# Altium PCB PCB1.PcbDoc
Units mm, origin at the board's own origin, x right, y up, seen from the top; angles counter-clockwise.
Board outline 65.91 x 73.15 mm, 2 copper layers (Top Layer, Bottom Layer); 22 components, 15 nets, 60 pads, 0 vias.
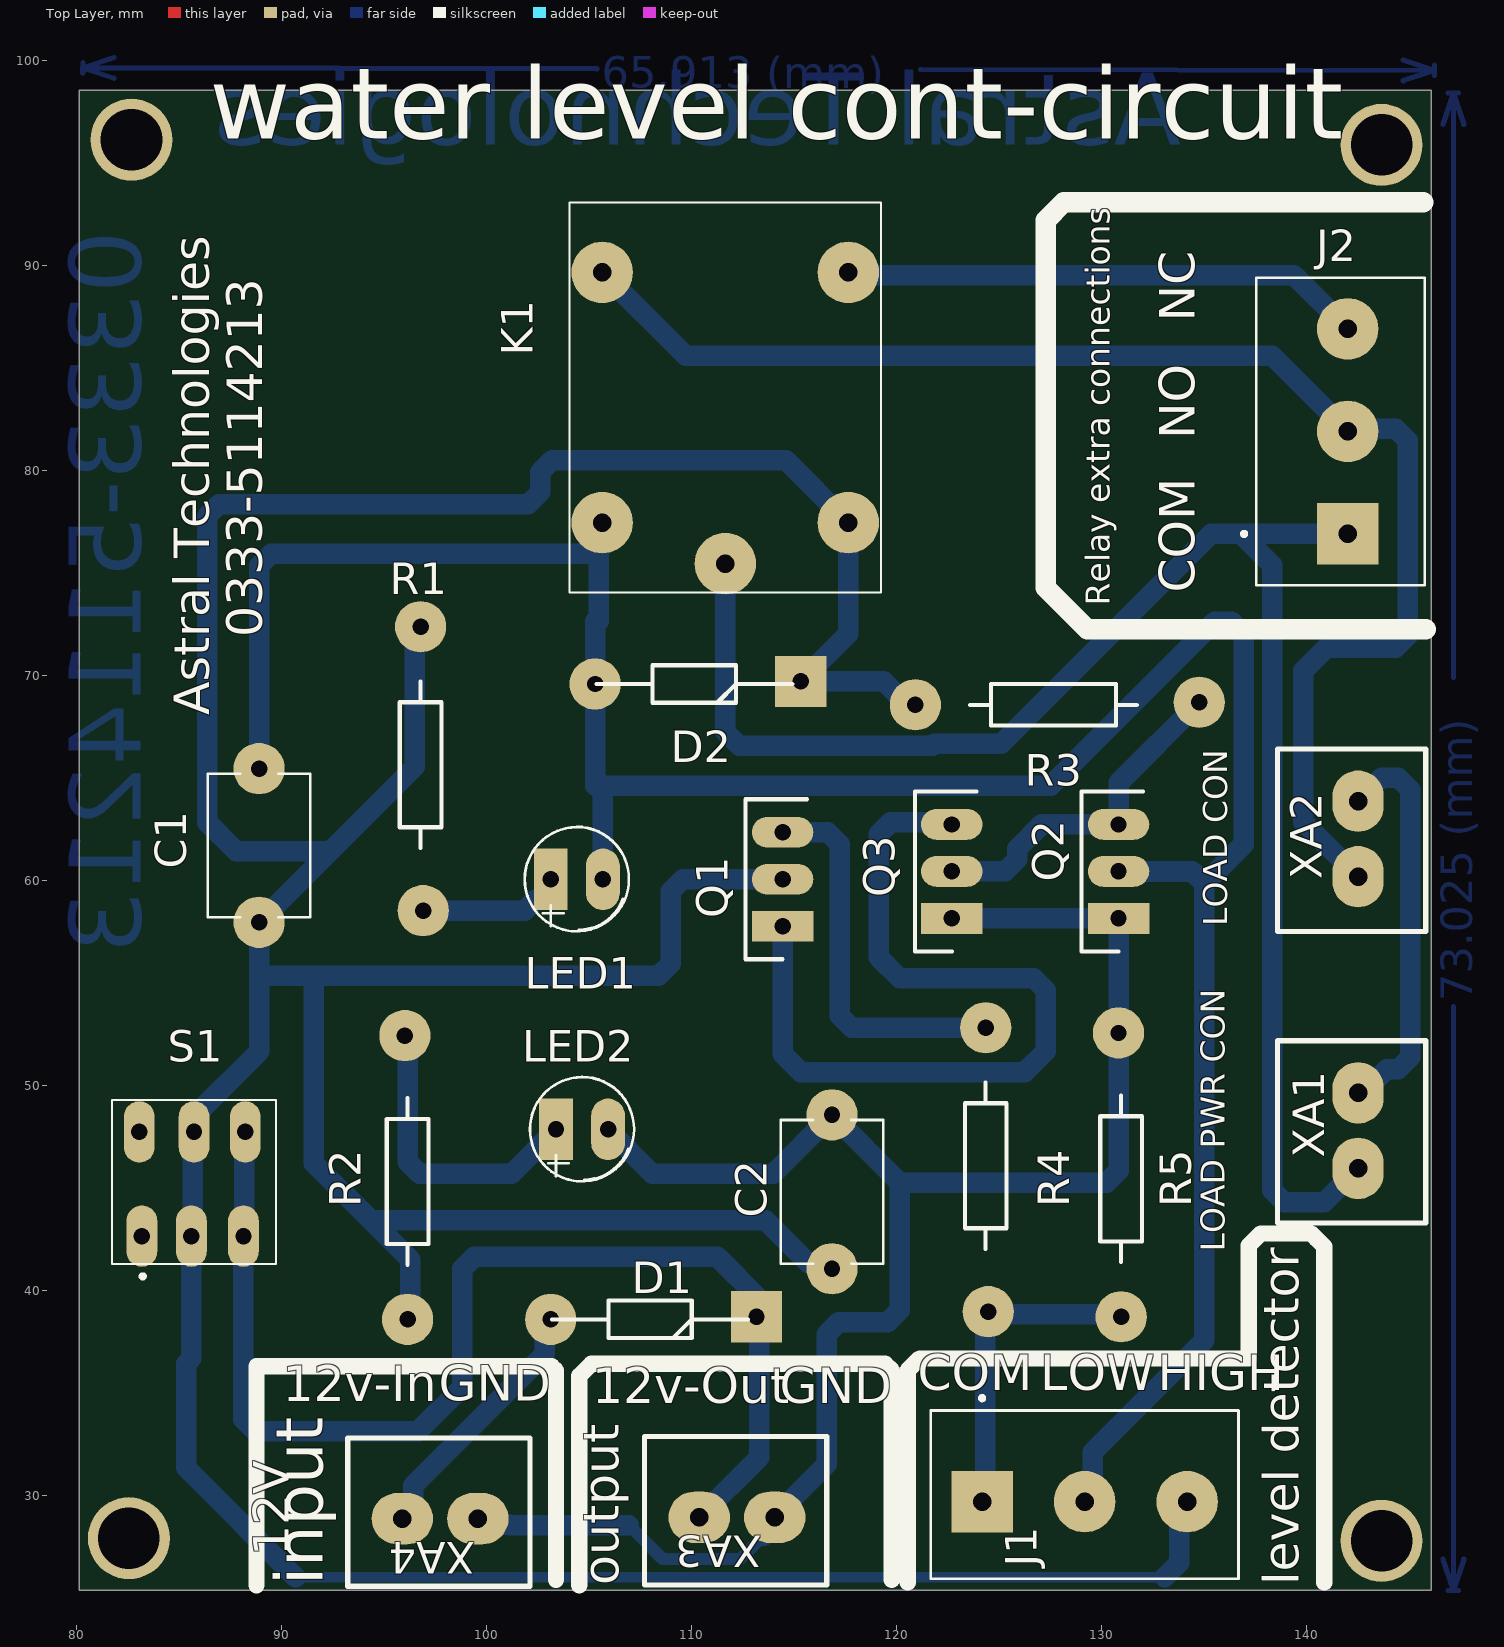
[diagram p0: Top Layer view]
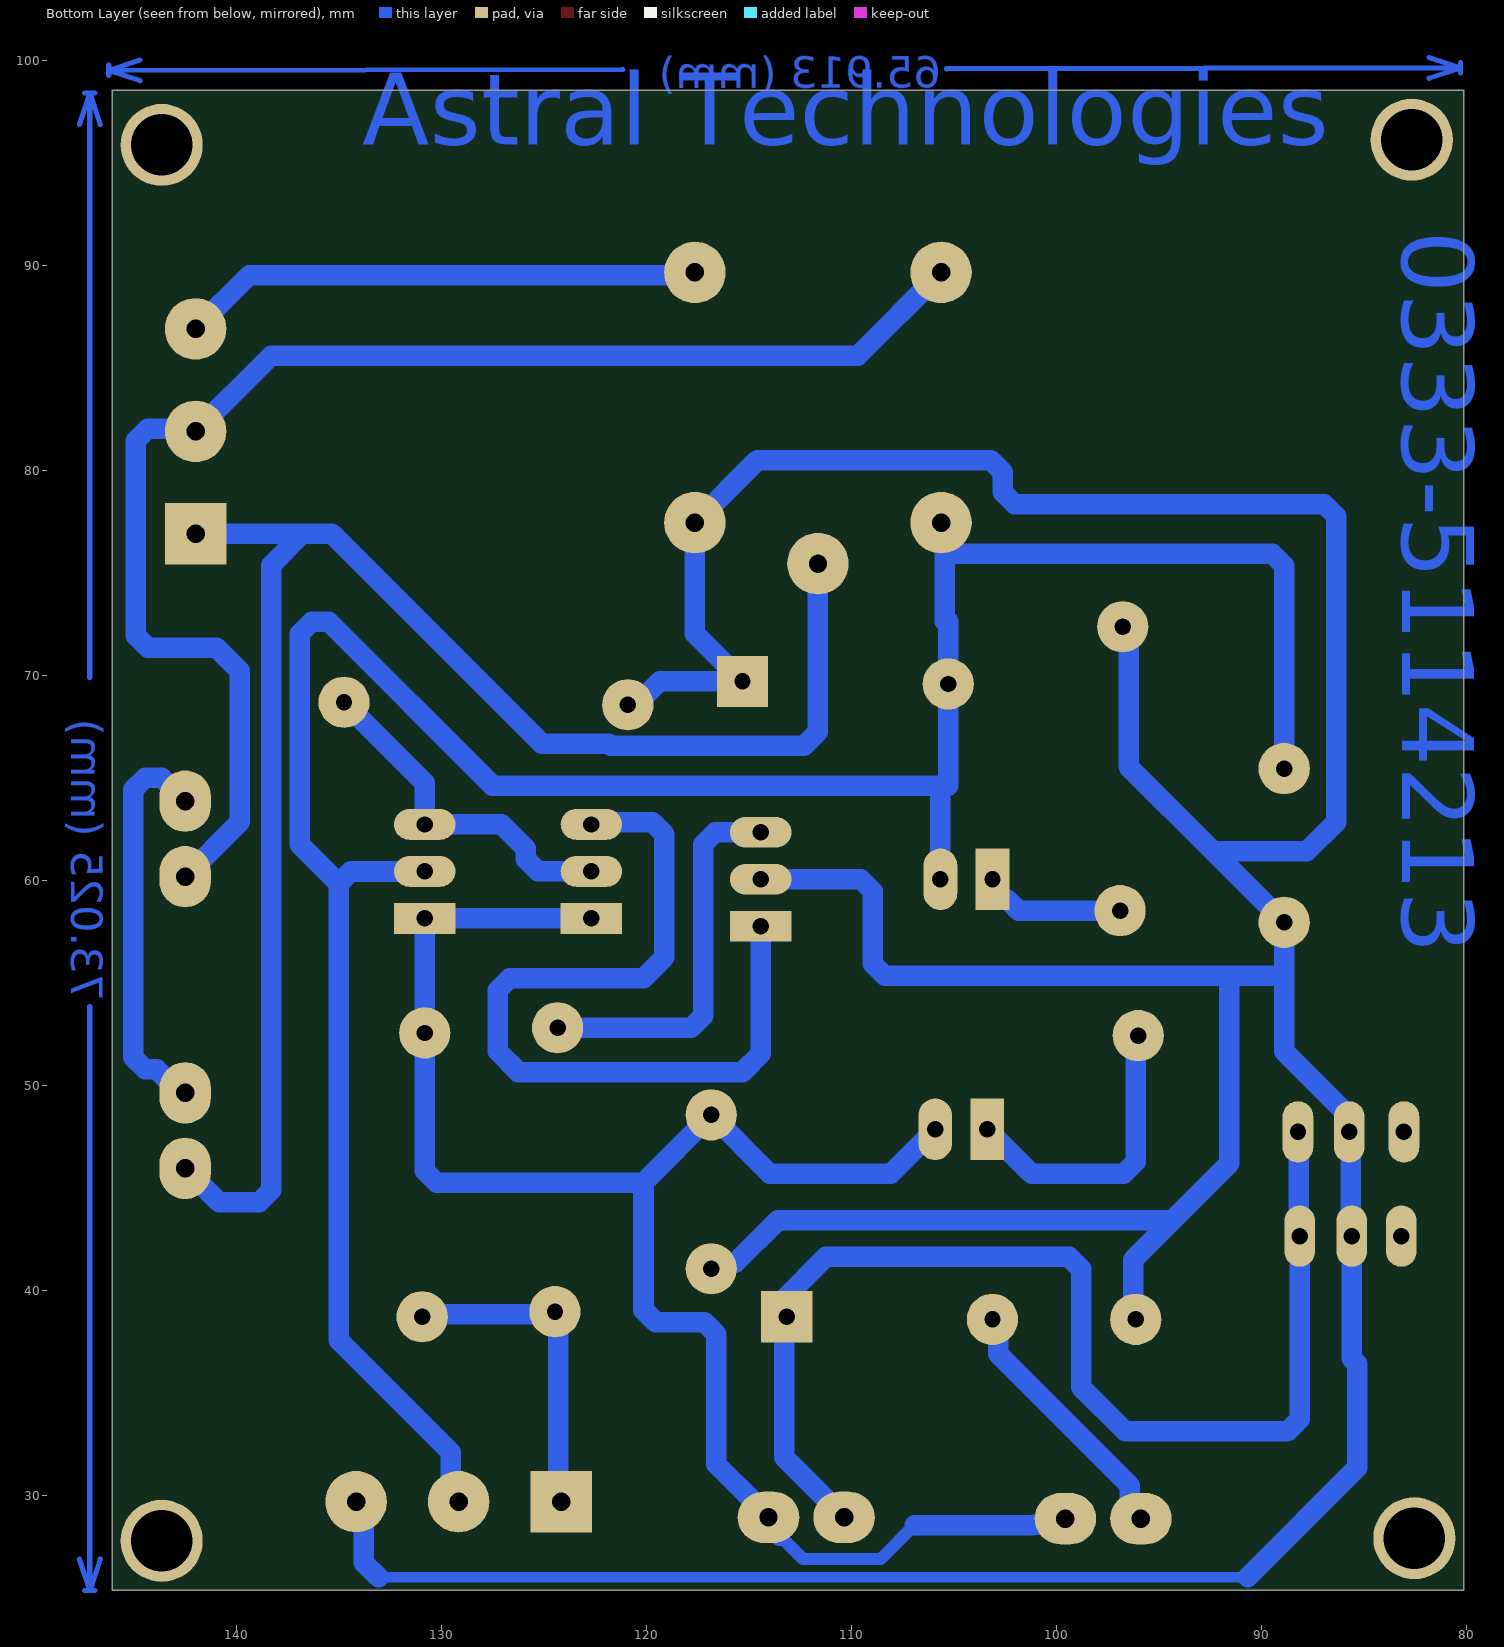
[diagram p1: Bottom Layer view, seen from below]
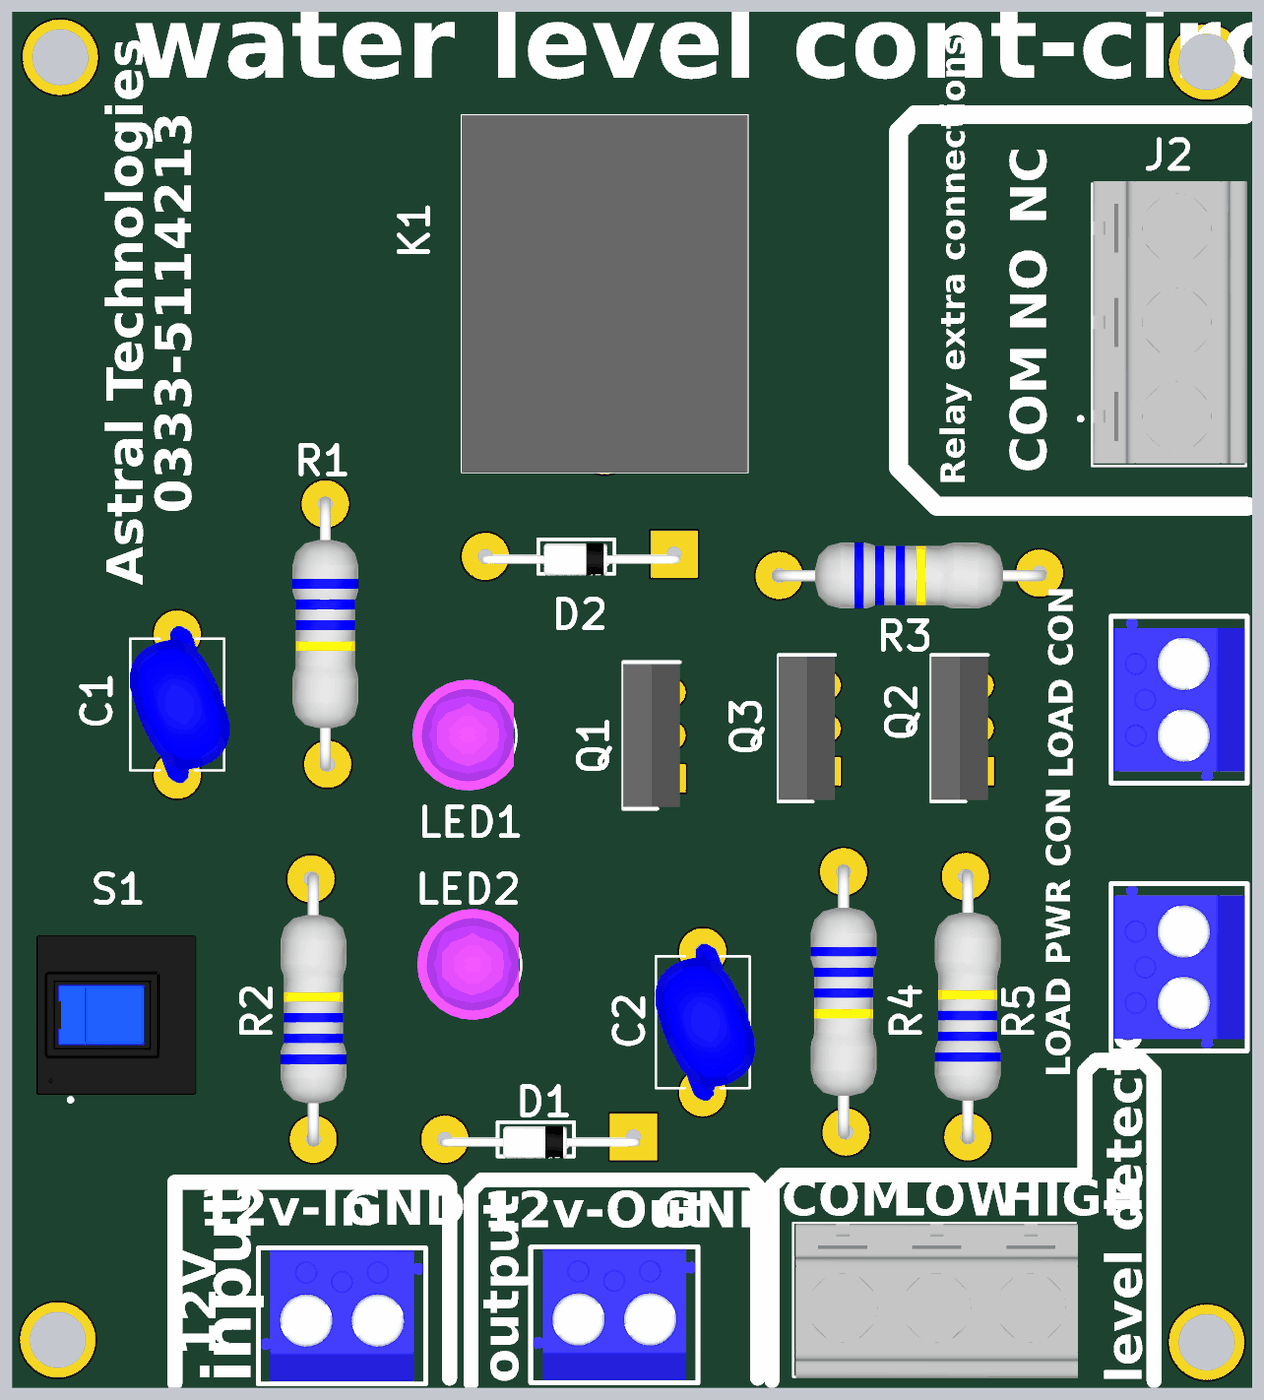
[diagram p2: 3D render of the assembled board from above, using the file's embedded part models]

## Layer stack, top to bottom
Top Solder: solder mask 0.0102, Solder Resist, Dk 3.5
Top Layer: signal copper 0.0356
Dielectric 1: dielectric 0.32, FR-4, Dk 4.8
Bottom Layer: signal copper 0.0356
Bottom Solder: solder mask 0.0102, Solder Resist, Dk 3.5

## Board outline
80.137,25.4 146.05,25.4 146.05,98.552 80.137,98.552

## Design rules (kind name [scope] priority, off if disabled: settings)
Clearance [All] p1: gap=0.254 ignorepadtopadclearanceinfootprint=FALSE except(0: Arc-Hole Track-Hole SMDPad-Hole THPad-Hole Via-Hole Fill-Hole Poly-Hole Region-Hole Text-Hole)
PolygonConnect [All] p1: connectstyle=Relief reliefconductorwidth=0.254 reliefentries=4 polygonreliefangle="90 Angle" airgapwidth=0.254
RoutingVias [All] p1: holewidth=0.711 width=1.27 viastyle="Through Hole" minholewidth=0.711 minwidth=1.27 maxholewidth=0.711 maxwidth=1.27
SolderMaskExpansion [All] p1: expansion=0.102 istentingtop=FALSE
Width [All] p1: maxlimit=1 minlimit=1 preferedwidth=1 minimp=50.000000 maximp=50.000000 favimp=50.000000
30 further rules are at their usual default settings.

## Components (designator, comment, footprint, x,y, rotation, side; value= is the part's Value field where it differs from the comment)
C1 "104pf" CAP_DE21XSA100KN3AY02F 88.9,61.722 r270 top
C2 "104pf" CAP_DE21XSA100KN3AY02F 116.84,44.831 r270 top
D1 "1N4007" DIOAD1138W56L406D183 113.665,38.608 r180 top
D2 "1n4007" DIOAD1138W56L406D183 115.824,69.596 r180 top
J1 "1776118-3" TE_1776118-3 129.159,29.718 r0 top
J2 "1776118-3" TE_1776118-3 141.986,81.915 r90 top
K1 "0476618" 0476618 111.633,83.566 r90 top
LED1 "" LED2-2.54-D10MM 104.394,60.071 r0 top
LED2 "" LED2-2.54-D10MM 104.648,47.879 r0 top
Q1 "C945" TO229P300X760X1364-3P 114.427,57.785 r90 top
Q2 "C945" TO229P300X760X1364-3P 130.81,58.166 r90 top
Q3 "C945" TO229P300X760X1364-3P 122.682,58.166 r90 top
R1 "" AXIAL-0.4 96.774,65.659 r90 top value=220R
R2 "" AXIAL-0.4 96.139,45.339 r270 top value=1K
R3 "" AXIAL-0.4 127.635,68.58 r180 top value=5.6k
R4 "" AXIAL-0.4 124.333,46.101 r90 top value=270k
R5 "" AXIAL-0.4 130.937,45.466 r270 top value=500k
S1 "MPSA-22E08-0150" MPSA22E080150 85.725,44.958 r0 top
XA1 "AC input" PHOENIX_MKDS1/2-3.81 147.574,43.18 r90 top
XA2 "motor" PHOENIX_MKDS1/2-3.81 147.574,57.404 r90 top
XA3 "extra 12v source" PHOENIX_MKDS1/2-3.81 107.569,23.876 r0 top
XA4 "12V supply" PHOENIX_MKDS1/2-3.81 93.091,23.814 r0 top

## Footprints (in the part's own frame and the unit in brackets; to place one, negate y for a bottom-side part, rotate by r counter-clockwise, add the part's x,y. Pads: shape width x height; smd on the part's side, far side on the other; paste and mask are expansions set on the pad)
0476618 [mm]
  round 3 hole 0.9: 1(-6.1,-6) 2(6.1,-6) 3(6.1,6) 4(-6.1,6) 5(-8.1,0)
  silkscreen extent -9.5,-7.6 9.5,7.6, body extent -9.5,-7.6 9.5,7.6, height 15.1
AXIAL-0.4 [mm] "Axial Device, Thru-Hole; 2 Leads; 0.4 in Pin Spacing"
  round 2.5 hole 0.8: 1(-7.112,-0.127) 2(6.731,0)
  silkscreen extent -4.06,-1.02 4.06,1.02, body extent -7.49,-1.75 7.11,1.75, height 4.29
CAP_DE21XSA100KN3AY02F [mm]
  round 2.5 hole 0.8: 1(-3.75,0) 2(3.75,0)
  silkscreen extent -3.5,-2.5 3.5,2.5, body extent -4.22,-2.54 4.22,2.79, height 8
DIOAD1138W56L406D183 [mm]
  rect 2.5x2.5 hole 0.8: 1(0.508,-0.127)
  round 2.5 hole 0.8: 2(10.541,0)
  silkscreen extent 0.92,-0.91 10.48,0.91, body extent 0.15,-0.69 10.77,1.02, height 2.12
LED2-2.54-D10MM [mm]
  oval 1.651x3 hole 0.8: NEG(1.27,0)
  rect 1.651x3 hole 0.8: POS(-1.27,0)
  silkscreen extent -2.54,-2.54 2.54,2.56, body extent -2.99,-2.92 2.41,2.98, height 9.2
MPSA22E080150 [mm]
  oval 1.5x3 hole 0.8: 1(-2.54,-2.286) 2(-0.127,-2.286) 3(2.413,-2.286) 4(-2.667,2.794) 5(0,2.794) 6(2.5,2.794)
  silkscreen extent -4,-4.35 4,4.35, body extent -4.31,-4 4.19,4.5, height 17
PHOENIX_MKDS1/2-3.81 [mm]
  oval 3x2.5 hole 0.9: 1(2.794,5.08) 2(6.477,5.08)
  silkscreen extent 0.13,1.78 9.02,9.02, body extent 0.28,1.91 8.86,8.9, height 8.26
TE_1776118-3 [mm]
  rect 3x3 hole 0.9: 1(-5,0)
  round 3 hole 0.9: 2(0,0) 3(5,0)
  silkscreen extent -7.5,-3.75 7.5,5.15, body extent -7.37,-3.81 7.63,4.39, height 9.69
TO229P300X760X1364-3P [mm]
  rect 1.5x3 hole 0.8: 1(0,0)
  oval 1.5x3 hole 0.8: 2(2.29,0) 3(4.58,0)
  silkscreen extent -1.61,-1.19 6.19,1.81, body extent -1.51,-1.19 6.09,1.81, height 12.76

## Part data
C1 C2: library part DE21XSA100KN3AY02F, Package=None, Availability=Unavailable, MP=DE21XSA100KN3AY02F, Price=None
D1 D2: library part 1N4678__DO35_, "Diode", Manufacturer_Name="Microsemi Corporation", Manufacturer_Part_Number="1N4678 (DO35)", Datasheet Link=https://www.microsemi.com/document-portal/doc_download/5827-1n4678-4717-datasheet
J1 J2: "Conn Terminal Block F 3 POS 5mm Solder ST Thru-Hole Package", Package=None, Availability=Unavailable, Centerline_Pitch="5 mm[.197 in]", EU_RoHS_Compliance="Compliant with Exemptions", MF="TE Connectivity", MP=1776118-3, Number_of_Positions=3, Price=None, SnapEDA_Link=https://www.snapeda.com/parts/1776118-3/TE%20Connectivity%20AMP%20Connectors/view-part/2375684/?ref=snap, TE_purchase_URL=https://www.te.com/usa-en/product-1776118-3.html?te_bu=Cor&te_type=disp&te_campaign=seda_glo_cor-seda-global-disp-prtnr-fy19-seda-model-bom-cta_sma-317_1&elqCampaignId=32493
K1: "Relay or Contactor", Manufacturer_Name="RS Components", Datasheet Link=https://docs-emea.rs-online.com/webdocs/1583/0900766b81583163.pdf, Height=15mm, Manufacturer_Part_Number=0476618
LED1 LED2: library part DIP-LED-GREEN-VAPOROUS-GREEN-10MM(2P-D10MM), "DIP LED Green-Vaporous Green-10mm", Package=None, Availability=Unavailable, MF=Chengguangxing, MP=G1004DC, Price=None, SnapEDA_Link=https://www.snapeda.com/parts/G1004DC/Chengguangxing/view-part/106403/?ref=snap
Q1 Q2 Q3: library part BD139G, "Transistor BJT NPN", Manufacturer_Name="ON Semiconductor", Mouser Part Number=863-BD139G, Arrow Part Number=BD139G, Arrow Price/Stock=https://www.arrow.com/en/products/bd139g/on-semiconductor, Datasheet Link=http://www.onsemi.com/pub/Collateral/BD135-D.PDF, Height=3mm, Manufacturer_Part_Number=BD139G, Mouser Price/Stock=https://www.mouser.co.uk/ProductDetail/ON-Semiconductor/BD139G?qs=vNc2DXHODiLIqGggNMT6cg%3D%3D
R1 R2 R3 R4 R5: library part Res2, "Resistor", LatestRevisionDate=17-Jul-2002, LatestRevisionNote="Re-released for DXP Platform.", PackageDescription="Axial Device, Thru-Hole; 2 Leads; 0.4 in Pin Spacing", PackageReference=AXIAL-0.4, Published=8-Jun-2000, Publisher="Altium Limited"
S1: "Switch", Manufacturer_Name=KNITTER-SWITCH, Datasheet Link=http://www.knitter-switch.com/eng/Series/17?search=MPSA-22E08-0150, Height=8mm, Manufacturer_Part_Number=MPSA-22E08-0150
XA1 XA2 XA3 XA4: library part MKDS1/2-3.81, "2 Position Wire to Board Terminal Block Horizontal with Board 0.150 _3.81mm_ Through Hole", Package=None, Availability=Unavailable, MF="Phoenix Contact", MP="MKDS 1/ 2-3.81", Price=None, SnapEDA_Link=https://www.snapeda.com/parts/MKDS%201/%202-3.81/Phoenix%20Contact/view-part/114562/?ref=snap

## Free pads (board coordinates)
  round 4 hole 3: 81(82.55,27.94) 81(82.677,96.139) 81(143.637,27.813) 81(143.637,95.885)

## Nets (pads, with @x,y where several pads share a name; then routed paths per layer and width w, separated by ;. In a path a pad name is that pad's centre, name@x,y a point inside that pad or via, vN(x,y) a via of type N, cw(c..) or ccw(c..) an arc to the next point about the centre after c; other vN are vias at no path point)
12V: D1.1 S1.3 S1.6 XA3.1 | length 59.1
  Bottom Layer w1: S1.3@88.138,42.097 88.138,33.733 88.724,33.147 96.652,33.147 98.806,35.301 98.806,41.07 99.392,41.656 111.252,41.656 113.284,39.624 113.284,31.877 XA3.1 ; S1.3 S1.3@88.182,42.716 ; S1.3@88.182,42.097 S1.3@88.182,42.716 ; S1.6 88.182,47.708 S1.3@88.182,42.716
COM: J1.1 R4.1 R5.2 | length 15.4
  Bottom Layer w1: J1.1 124.309,29.869 124.309,38.838 R4.1 ; R4.1@124.968,38.862 130.81,38.862 R5.2
GND: C2.1 LED2.NEG Q2.1 Q3.1 R5.1 XA3.2 XA4.2 | length 85.6
  Bottom Layer w0.6: 106.924,28.575 108.575,26.924 112.362,26.924 XA3.2@113.509,28.071
  Bottom Layer w1: XA4.2 99.855,28.607 101.122,28.607 101.154,28.575 106.924,28.575 ; LED2.NEG 108.077,45.72 113.979,45.72 C2.1 120.142,45.279 ; XA3.2@113.509,28.071 113.509,28.263 114.581,29.335 114.581,29.543 116.586,31.548 116.586,37.895 117.172,38.481 119.556,38.481 120.142,39.067 120.142,45.279 ; Q3.1 Q2.1 R5.1 130.81,45.865 130.224,45.279 120.142,45.279
HIGH: C1.2 C2.2 D2.1 J1.3 K1.1 Q1.2 R1.2 R2.2 R3.2 S1.2 S1.5 | length 242
  Bottom Layer w0.5: 90.678,26.035 104.394,26.035 133.064,26.035
  Bottom Layer w1: 90.678,26.035 85.344,31.369 85.344,36.451 85.598,36.705 S1.2 85.661,42.735 85.661,47.688 S1.5 85.725,48.502 88.9,51.677 88.9,55.372 ; R2.2@96.266,38.608 96.266,41.529 94.361,43.434 ; R1.2 96.487,72.103 96.487,65.559 92.363,61.434 ; Q1.2 109.552,60.075 108.966,59.489 108.966,55.958 108.38,55.372 91.567,55.372 ; C2.2 116.553,41.368 115.665,41.368 113.599,43.434 94.361,43.434 ; R3.2 120.498,68.58 119.355,69.723 D2.1 117.633,72.04 K1.1 114.581,80.518 103.202,80.518 102.616,79.932 102.616,78.945 102.03,78.359 86.946,78.359 86.36,77.773 86.36,62.865 87.791,61.434 92.363,61.434 ; 133.064,26.035 133.776,26.748 133.776,29.335 J1.3 ; 88.9,55.372 91.567,55.372 ; 88.9,55.372 C1.2 92.363,61.434 ; 91.567,55.372 91.567,46.228 94.361,43.434
LOW: C1.1 D2.2 J1.2 K1.4 LED1.NEG Q2.2 | length 129.3
  Bottom Layer w1: C1.1 88.9,75.36 89.486,75.946 105.458,75.946 ; 105.283,72.644 D2.2 105.283,64.643 127.508,64.643 135.492,72.627 136.32,72.627 136.906,72.041 136.906,61.771 135.001,59.866 ; 105.458,72.644 105.458,75.946 ; K1.4 105.458,77.291 105.458,75.946 ; LED1.NEG 105.664,64.643 ; J1.2 129.542,30.101 129.542,32.133 135.001,37.592 135.001,59.866 ; Q2.2 130.814,60.452 134.415,60.452 135.001,59.866
NetD1_2: D1.2 XA4.1 | length 12.6
  Bottom Layer w1: XA4.1 96.422,29.431 96.422,30.509 102.837,36.924 102.837,38.481 D1.2@102.964,38.608
NetJ2_1: J2.1 K1.5 XA1.1 | length 80.9
  Bottom Layer w1: K1.5 111.633,67.261 112.318,66.576 121.734,66.576 121.833,66.675 125.095,66.675 135.335,76.915 136.779,76.915 ; J2.1 136.779,76.915 ; XA1.1 140.843,44.323 138.889,44.323 138.303,44.909 138.303,75.391 136.779,76.915
NetJ2_2: J2.2 K1.3 XA2.1 | length 69.2
  Bottom Layer w1: K1.3 109.701,85.598 138.303,85.598 J2.2 142.113,82.042 144.321,82.042 144.907,81.456 144.907,71.96 144.321,71.374 140.97,71.374 139.827,70.231 139.827,62.865 XA2.1
NetJ2_3: J2.3 K1.2 | length 25.5
  Bottom Layer w1: K1.2 117.764,89.535 139.366,89.535 J2.3
NetLED1_POS: LED1.POS R1.1 | length 7.7
  Bottom Layer w1: R1.1@96.487,58.547 101.854,58.547 102.378,59.071 102.799,59.071 103.124,59.397 LED1.POS
NetLED2_POS: LED2.POS R2.1 | length 14.5
  Bottom Layer w1: R2.1@96.139,52.451 96.139,46.306 96.725,45.72 101.219,45.72 LED2.POS
NetQ1_1: Q1.1 Q3.3 | length 41.5
  Bottom Layer w1: Q1.1 114.427,51.562 115.316,50.673 126.238,50.673 127.254,51.689 127.254,54.659 126.668,55.245 120.142,55.245 119.126,56.261 119.126,62.279 119.712,62.865 120.678,62.865 120.701,62.842 122.586,62.842 Q3.3
NetQ1_3: Q1.3 R4.2 | length 18.8
  Bottom Layer w1: Q1.3 116.635,62.365 117.221,61.779 117.221,53.418 117.807,52.832 R4.2
NetQ2_3: Q2.3 Q3.2 R3.1 | length 17
  Bottom Layer w1: Q3.2 125.287,60.456 125.873,61.042 125.873,61.561 127.058,62.746 Q2.3 130.81,64.77 R3.1
NetXA1_2: XA1.2 XA2.2 | length 19.7
  Bottom Layer w1: XA1.2@142.494,49.403 143.891,50.8 144.448,50.8 145.034,51.386 145.034,64.438 144.448,65.024 143.637,65.024 XA2.2
pads on no net: S1.1 S1.4
copper on no net: | length 122
  Bottom Layer w0.254: 80.304,99.393 80.305,99.901 ; 81.828,99.136 80.305,99.647 ; 81.83,100.152 80.305,99.647 ; 105.364,99.598 80.305,99.647 ; 121.158,99.568 146.218,99.52 ; 144.693,99.015 146.218,99.52 ; 144.695,100.031 146.218,99.52 ; 146.217,99.266 146.218,99.774 ; 146.634,26.909 147.142,25.385 ; 146.634,96.886 147.142,98.41 ; 146.888,25.385 147.396,25.385 ; 146.888,98.41 147.396,98.41 ; 147.142,53.873 147.142,25.385 ; 147.142,69.921 147.142,98.41 ; 147.65,26.909 147.142,25.385 ; 147.65,96.886 147.142,98.41

## Other copper
Bottom Layer:
  text "65.913 (mm)" at 105.616,98.684 h1.52 r359.89
  text "Astral Technologies" at 133.858,94.749 h6
  text "0333-5114213" at 84.275,91.694 h6 r90
  text "73.025 (mm)" at 148.057,54.127 h1.52 r90

## Silkscreen, mask and mechanical layers (free items; w line width, h text height)
Top Overlay:
  lines w0.8: 88.773,25.654 88.773,36.322 95.591,36.322 103.173,36.322 103.378,36.117 103.378,25.908 ; 104.521,25.654 104.521,35.863 105.107,36.449 119.429,36.449 119.761,36.117 119.761,25.908 ; 120.523,25.781 120.523,36.117 121.109,36.703 137.16,36.703 137.16,42.213 137.746,42.799 140.208,42.799 140.462,42.545 140.843,42.164 140.843,37.371 ; 140.843,25.781 140.843,37.211
  lines w1: 145.669,93.091 137.287,93.091 128.143,93.091 127.254,92.202 127.254,74.295 129.286,72.263 145.796,72.263
  text "water level cont-circuit" at 86.487,95.049 h6
  text "NC" at 135.102,87.249 h3 r90
  text "NO" at 135.102,81.534 h3 r90
  text "COM" at 135.102,74.041 h3 r90
  text "Relay extra connections" at 130.766,73.406 h2 r90
  text "0333-5114213" at 89.636,71.882 h3 r90
  text "Astral Technologies" at 87.055,68.072 h3 r90
  text "LOAD CON" at 136.507,57.785 h2 r90
  text "LOAD PWR CON" at 136.38,41.91 h2 r90
  text "COM" at 121.031,34.57 h3
  text "LOW" at 127,34.57 h3
  text "HIGH" at 132.715,34.57 h3
  text "GND" at 97.663,34.062 h3
  text "12v-In" at 90.043,34.036 h3
  text "12v-Out" at 105.156,33.935 h3
  text "GND" at 114.3,33.935 h3
  text "12V" at 90.932,27.051 h3 r90
  text "input" at 92.787,25.654 h4 r90
  text "output" at 107.023,25.654 h3 r90
  text "level detector" at 140.182,25.654 h3 r90